# EAGLE board fingerprint (EAGLE 7.7.0)
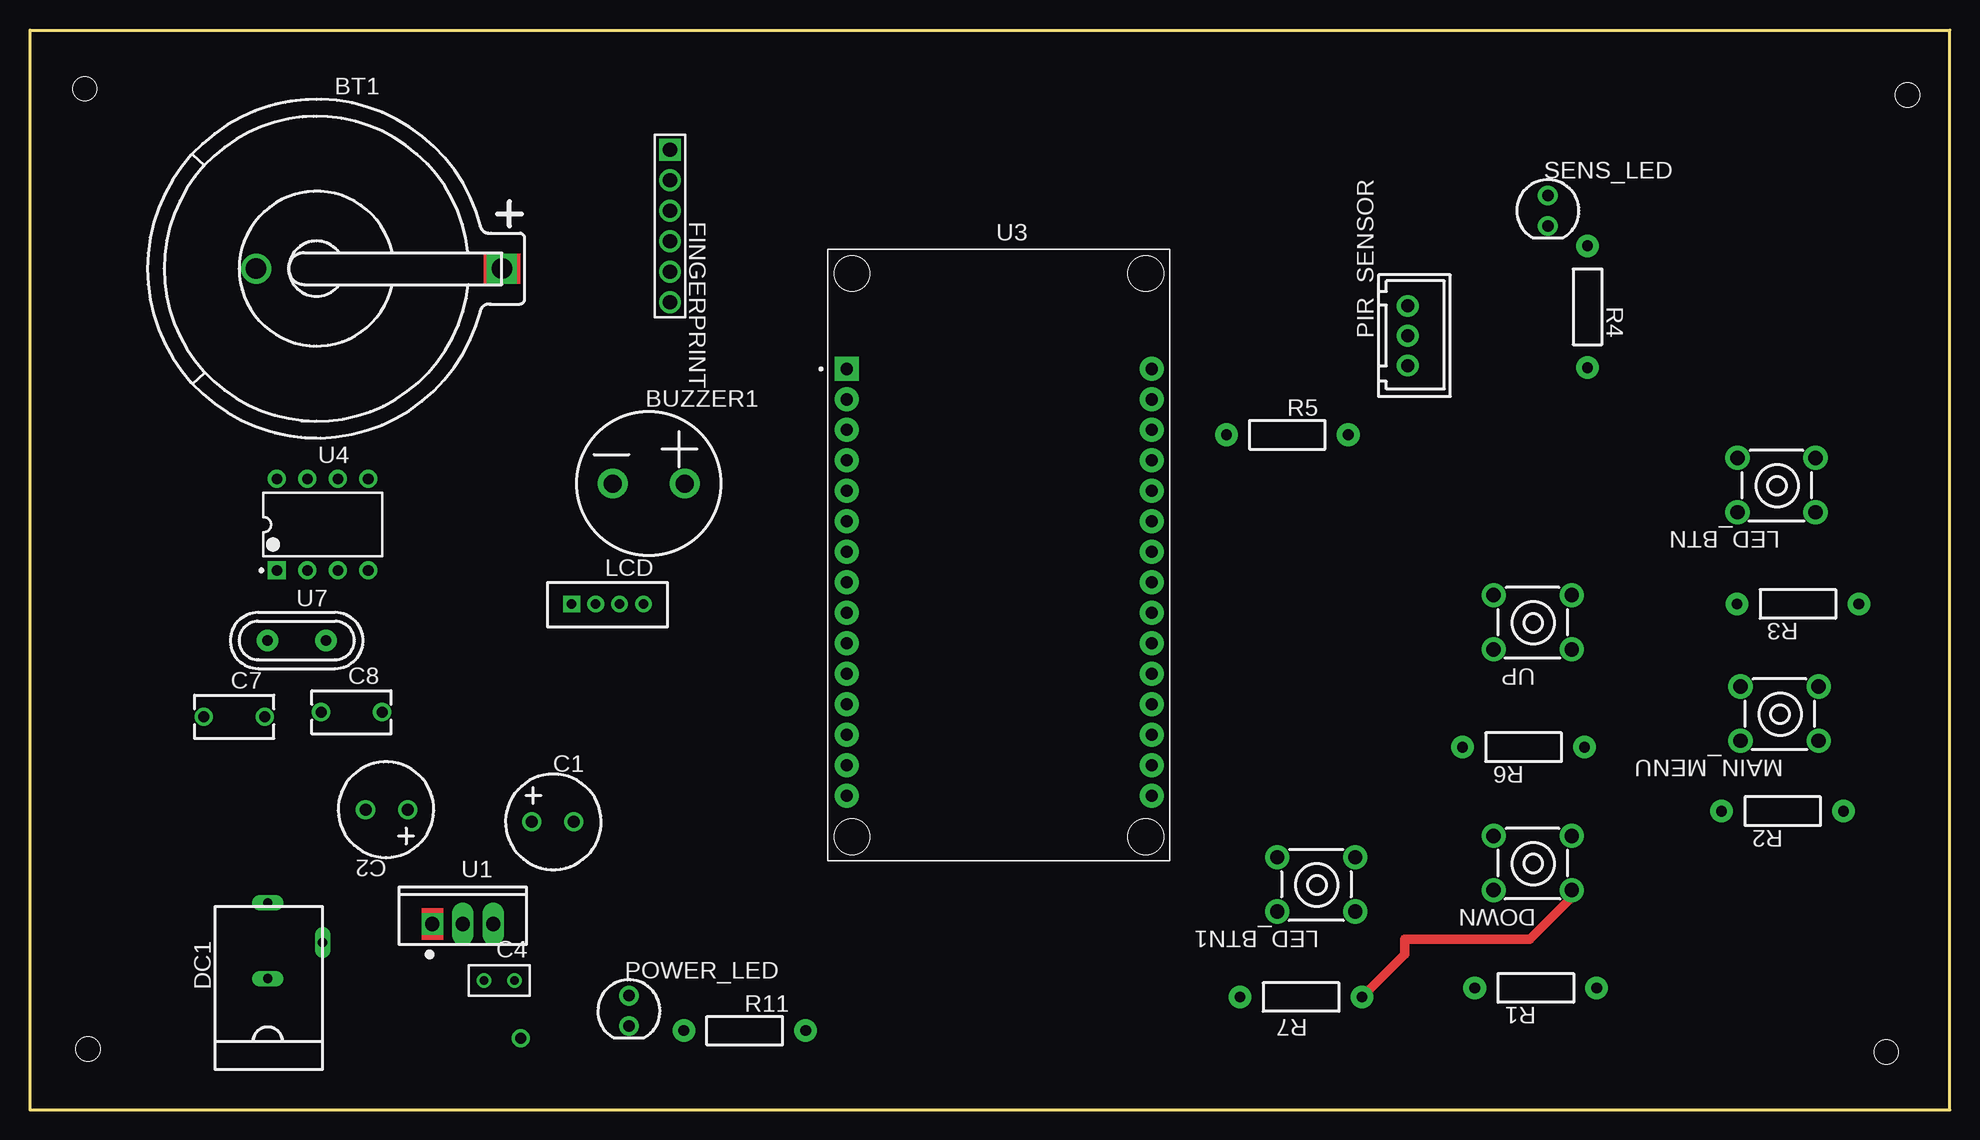
[diagram p0: board, top side]
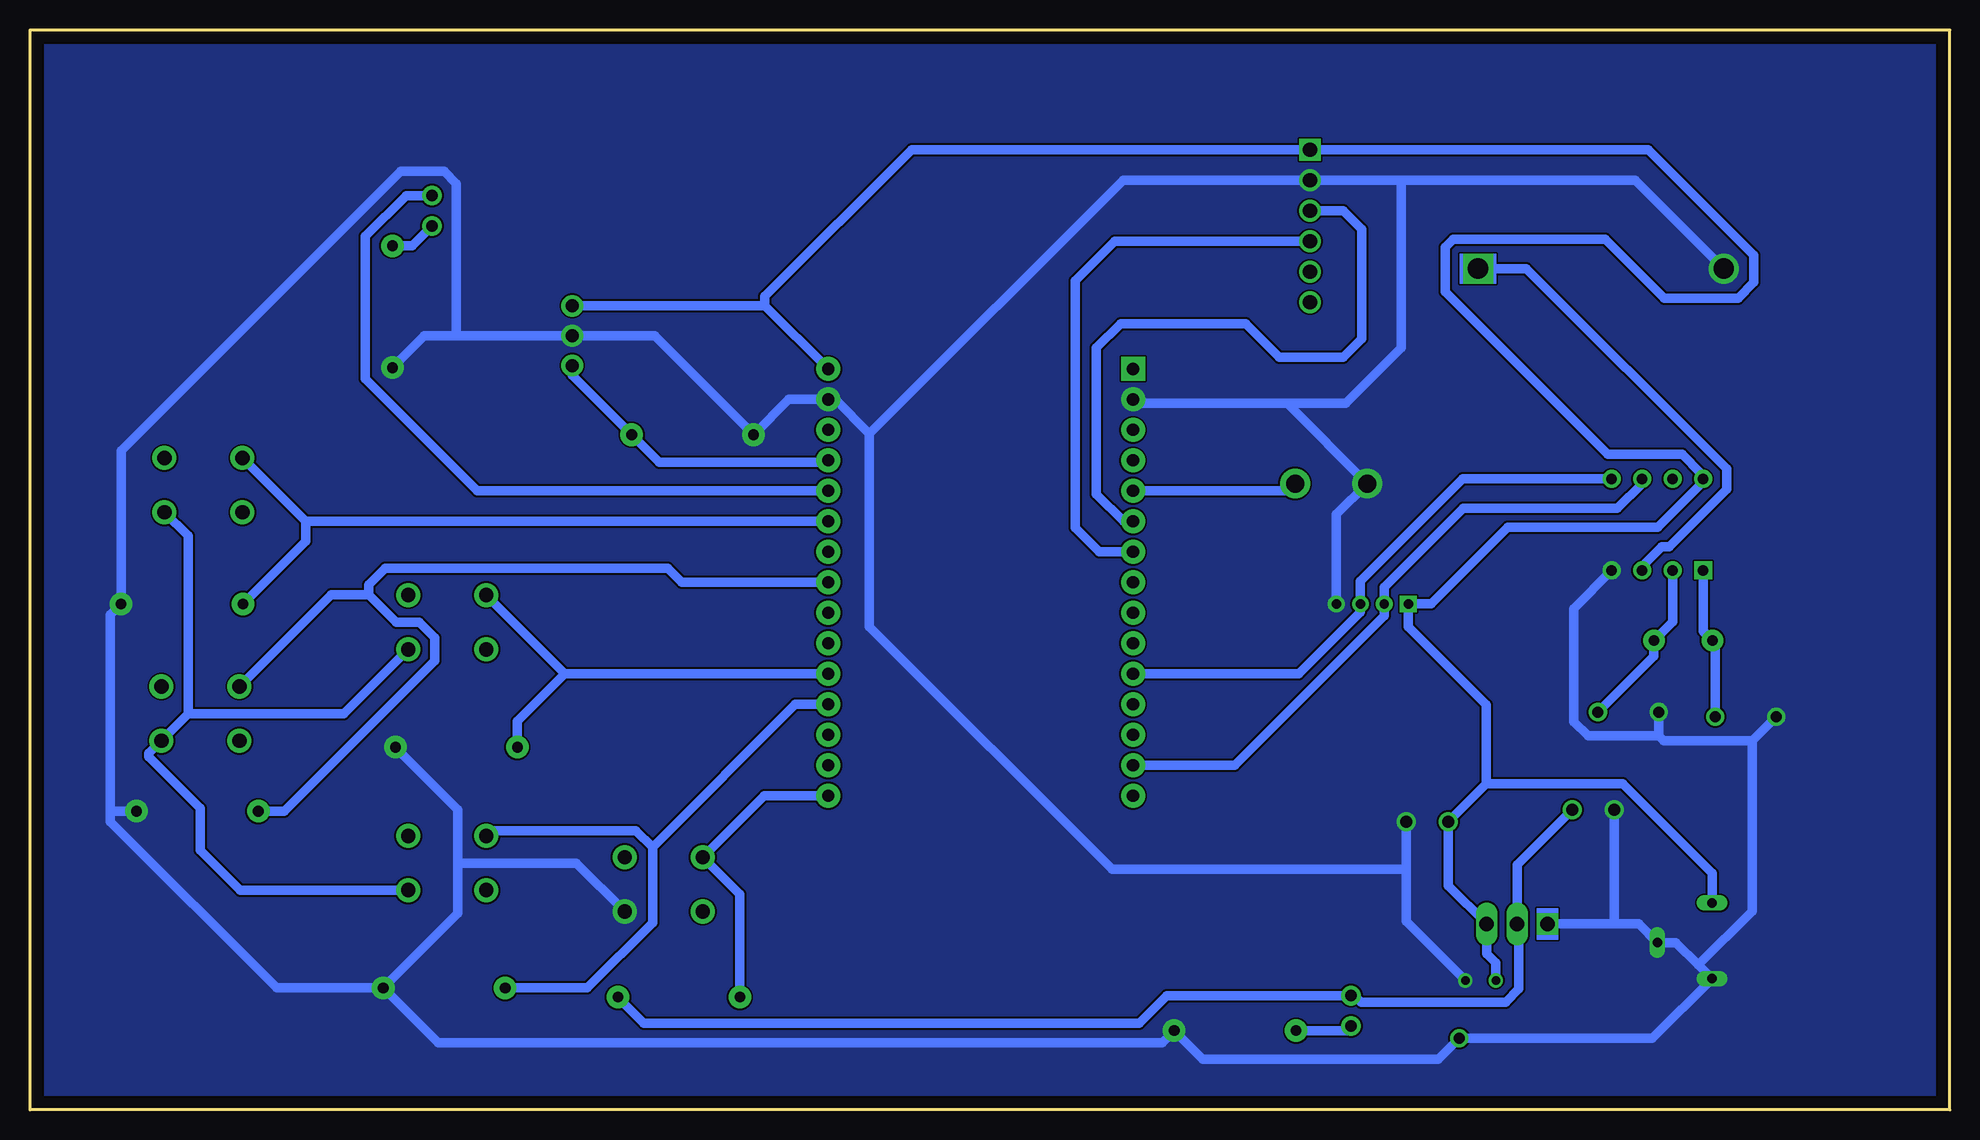
[diagram p1: board, bottom side, seen from below]

Size 159.99 x 89.99 mm. Coordinates in mm from the lower left corner, seen from the top.
Outline: 0,0 0,89.99 160,89.99 160,0 0,0
Copper layers (1*16): Top 0.035mm / dielectric 1.5mm / Bottom 0.035mm
Design rules "PCB_PCB_Fingerprint_2_2023-07-20": minimum track width 6mil, minimum drill 0.35mm, track to track 6mil, track to pad 6mil, pad to pad 6mil, via to via 6mil, smd to smd 6mil, copper to edge 40mil, drill to drill 6mil, minimum pad ring 0mil, minimum via ring 0mil, stop-mask expansion 4mil, vias tented up to drill 0mil, thermal gap 10mil

## Footprints (pad centres in the part's own frame; a part is rotated, then mirrored left to right if it is on the bottom)
BAT-TH_KEYSTONE-1025-7_1PRIMARY = drill 1.702 pad 2.489 square: 1 10.236,0 | drill 1.702 pad 2.489: 2 -10.236,0
BUZ-TH_BD12.0-P6.00-D0.9-RD_1PRIMARY = drill 1.499 pad 2.489: 1 -2.997,0; 2 2.997,0
C1_1PRIMARY = drill 0.991 pad 1.6: 1 -1.753,0; 2 1.753,0
C2_1PRIMARY = drill 0.991 pad 1.6: 1 -1.753,0; 2 1.753,0
RAD-0.1_1PRIMARY = drill 0.711 pad 1.194: 1 -1.27,0; 2 1.27,0
CAP-TH_L6.5-W3.5-P5.00-D1.0_1PRIMARY = drill 0.914 pad 1.524: 1 -2.54,0; 2 2.54,0
DC-5020_1PRIMARY = drill 0.787 pad 1.295 long: 1 3.15,2.286; 2 -3.15,2.286; 3 -0.152,-2.286
KEY-TH_4P-L6.0-W6.0-P4.50_1PRIMARY = drill 1.194 pad 2.007: 1 -3.251,-2.261; 2 3.251,-2.261; 3 3.251,2.261; 4 -3.251,2.261
P:EX60Y60D361 = drill 0.914 pad 1.524: 1 0,0
HDR-TH_6P-P2.54-V-M-1_1PRIMARY = drill 1.194 pad 1.803 square: 1 -6.35,0 | drill 1.194 pad 1.803: 2 -3.81,0; 3 -1.27,0; 4 1.27,0; 5 3.81,0; 6 6.35,0
CONN-TH_4P-P2.00_JST_04DA-8M_1PRIMARY = drill 0.787 pad 1.397 square: 1 -2.997,0 | drill 0.787 pad 1.397: 2 -0.991,0; 3 0.991,0; 4 2.997,0
CONN-TH_3P-P2.50_JST3-2.5T-1F6PRIMARY = drill 1.092 pad 1.803: 1 2.489,0; 2 0,0; 3 -2.489,0
LED-TH_BD5.0_BLUE_1PRIMARY = drill 0.965 pad 1.651: 1 0,1.27; 2 0,-1.27
R_AXIAL-0.4_1PRIMARY = drill 0.889 pad 1.88: 1 -5.08,0; 2 5.08,0
R_AXIAL-0.4_2PRIMARY = drill 0.889 pad 1.88: 1 -5.08,0; 2 5.08,0
R_AXIAL-0.4_3PRIMARY = drill 0.889 pad 1.88: 1 -5.08,0; 2 5.08,0
TO-220-3_L10.0-W4.5-P2.54-L_1PRIMARY = drill 1.194 pad 1.803 square: 1 -2.54,0 | drill 1.194 pad 1.803 long: 2 0,0; 3 2.54,0
MODULE_ESP32_DEVKIT_V1_1PRIMARY = drill 1.016 pad 2.007 square: 1 -12.7,15.519 | drill 1.016 pad 2.007: 2 -12.7,12.979; 3 -12.7,10.439; 4 -12.7,7.899; 5 -12.7,5.359; 6 -12.7,2.819; 7 -12.7,0.279; 8 -12.7,-2.261; 9 -12.7,-4.801; 10 -12.7,-7.341; 11 -12.7,-9.881; 12 -12.7,-12.421; 13 -12.7,-14.961; 14 -12.7,-17.501; 15 -12.7,-20.041; 16 12.7,-20.041; 17 12.7,-17.501; 18 12.7,-14.961; 19 12.7,-12.421; 20 12.7,-9.881; 21 12.7,-7.341; 22 12.7,-4.801; 23 12.7,-2.261; 24 12.7,0.279; 25 12.7,2.819; 26 12.7,5.359; 27 12.7,7.899; 28 12.7,10.439; 29 12.7,12.979; 30 12.7,15.519
DIP-8_L9.8-W6.6-P2.54-LS7.6-50PRIMARY = drill 0.889 pad 1.499 square: 1 -3.81,-3.81 | drill 0.889 pad 1.499: 2 -1.27,-3.81; 3 1.27,-3.81; 4 3.81,-3.81; 5 3.81,3.81; 6 1.27,3.81; 7 -1.27,3.81; 8 -3.81,3.81
HC-49S_L11.0-W4.7-P4.88_1PRIMARY = drill 0.889 pad 1.803: 1 -2.438,0; 2 2.438,0

## Placement (x,y rotation side)
BT1  1025-7  [BAT-TH_KEYSTONE-1025-7_1PRIMARY]  29.08,70.1 0 top
BUZZER1  BUZZER  [BUZ-TH_BD12.0-P6.00-D0.9-RD_1PRIMARY]  51.56,52.2 0 top
C1  10u/50v  [C1_1PRIMARY]  43.56,24 0 top
C2  22u/50v  [C2_1PRIMARY]  29.72,25.02 180 top
C4  0.1u  [RAD-0.1_1PRIMARY]  39.12,10.8 0 top
C7  6pF  [CAP-TH_L6.5-W3.5-P5.00-D1.0_1PRIMARY]  17.02,32.77 0 top
C8  6pF  [CAP-TH_L6.5-W3.5-P5.00-D1.0_1PRIMARY]  26.8,33.15 0 top
DC1  DC005-2.0MM  [DC-5020_1PRIMARY]  22.1,14.1 90 top
DOWN  button6*6*8.5  [KEY-TH_4P-L6.0-W6.0-P4.50_1PRIMARY]  125.22,20.57 180 top
DUMMY1  [P:EX60Y60D361]  40.89,5.97 0 top
FINGERPRINT  Header-Male-2.54_1x6  [HDR-TH_6P-P2.54-V-M-1_1PRIMARY]  53.34,73.66 270 top
LCD  04DA-8M_LF__SN_  [CONN-TH_4P-P2.00_JST_04DA-8M_1PRIMARY]  48.13,42.16 0 top
LED_BTN  button6*6*8.5  [KEY-TH_4P-L6.0-W6.0-P4.50_1PRIMARY]  145.54,52.07 180 top
LED_BTN1  button6*6*8.5  [KEY-TH_4P-L6.0-W6.0-P4.50_1PRIMARY]  107.19,18.8 180 top
MAIN_MENU  button6*6*8.5  [KEY-TH_4P-L6.0-W6.0-P4.50_1PRIMARY]  145.8,33.02 180 top
PIR_SENSOR  JST3-2.5T-1-3A  [CONN-TH_3P-P2.50_JST3-2.5T-1F6PRIMARY]  114.81,64.52 90 top
POWER_LED  LED-TH-5mm_B  [LED-TH_BD5.0_BLUE_1PRIMARY]  49.91,8.26 0 top
R1  10k  [R_AXIAL-0.4_1PRIMARY]  125.48,10.16 180 top
R2  10k  [R_AXIAL-0.4_1PRIMARY]  146.05,24.89 180 top
R3  10k  [R_AXIAL-0.4_1PRIMARY]  147.32,42.16 180 top
R4  220  [R_AXIAL-0.4_2PRIMARY]  129.79,66.93 270 top
R5  10k  [R_AXIAL-0.4_3PRIMARY]  104.78,56.26 0 top
R6  10k  [R_AXIAL-0.4_1PRIMARY]  124.46,30.23 180 top
R7  10k  [R_AXIAL-0.4_1PRIMARY]  105.92,9.4 180 top
R11  220  [R_AXIAL-0.4_3PRIMARY]  59.56,6.6 0 top
SENS_LED  LED-TH-5mm_B  [LED-TH_BD5.0_BLUE_1PRIMARY]  126.49,74.93 0 top
U1  LM1117T-3.3  [TO-220-3_L10.0-W4.5-P2.54-L_1PRIMARY]  36.07,15.49 0 top
U3  ESP32-DEVKIT-V1  [MODULE_ESP32_DEVKIT_V1_1PRIMARY]  80.77,46.23 0 top
U4  DS1307+  [DIP-8_L9.8-W6.6-P2.54-LS7.6-50PRIMARY]  24.38,48.77 0 top
U7  XTAL-10D8X4D5-P5D08  [HC-49S_L11.0-W4.7-P4.88_1PRIMARY]  22.22,39.12 0 top
UP  button6*6*8.5  [KEY-TH_4P-L6.0-W6.0-P4.50_1PRIMARY]  125.22,40.64 180 top

## Library data of the parts
BT1 BUZZER1 C1 C2 C4 C7 C8 DC1 DOWN DUMMY1 FINGERPRINT LCD LED_BTN LED_BTN1 MAIN_MENU PIR_SENSOR POWER_LED R1-R7 R11 SENS_LED U1 U3 U4 U7 UP = PCB_PCB_Fingerprint_2_2023-07-20

## Nets
3.3V: C2.1 DOWN.4 LED_BTN.4 MAIN_MENU.4 POWER_LED.1 R7.1 U1.2 UP.4
5V: C1.1 C4.1 DC1.1 FINGERPRINT.1 LCD.1 PIR_SENSOR.1 U1.3 U3.30 U4.8
D4: BUZZER1.2 U3.5
DOWN_1: DOWN.1
DOWN_3: DOWN.3
DWN_BTN: DOWN.2 R1.2 U3.19
DX1: C7.2 U4.1 U7.1
DX2: C8.2 U4.2 U7.2
FINGERPRINT_5: FINGERPRINT.5
FINGERPRINT_6: FINGERPRINT.6
GND: BT1.2 BUZZER1.1 C1.2 C2.2 C4.2 C7.1 C8.1 DC1.2 DC1.3 FINGERPRINT.2 LCD.4 LED_BTN1.4 PIR_SENSOR.2 R1.1 R2.1 R3.1 R4.2 R5.1 R6.1 R11.2 U1.1 U3.2 U3.29 U4.4
LED_BTN: LED_BTN.2 R3.2 U3.25
LED_BTN1_1: LED_BTN1.1
LED_BTN1_3: LED_BTN1.3
LED_BTN_1: LED_BTN.1
LED_BTN_3: LED_BTN.3
MAIN_BTN: MAIN_MENU.2 R2.2 U3.23
MAIN_MENU_1: MAIN_MENU.1
MAIN_MENU_3: MAIN_MENU.3
MOTION: PIR_SENSOR.3 R5.2 U3.27
PIR_LED: SENS_LED.1 U3.26
R11_1: POWER_LED.2 R11.1
RESET: LED_BTN1.2 R7.2 U3.16
RX: FINGERPRINT.4 U3.7
SCL: LCD.2 U3.14 U4.6
SDA: LCD.3 U3.11 U4.5
SENS_LED_2: R4.1 SENS_LED.2
TX: FINGERPRINT.3 U3.6
U3_1: U3.1
U3_3: U3.3
U3_4: U3.4
U3_8: U3.8
U3_9: U3.9
U3_10: U3.10
U3_12: U3.12
U3_13: U3.13
U3_15: U3.15
U3_17: U3.17
U3_18: U3.18
U3_21: U3.21
U3_22: U3.22
U3_24: U3.24
U3_28: U3.28
U4_3: BT1.1 U4.3
UP_1: UP.1
UP_3: UP.3
UP_BTN: R6.2 U3.20 UP.2

## Tracks (layer width: path | path; a pad name or v marks a point on that pad's centre or on a via)
3.3V
  Top 0.8: DOWN.4 128.47,17.73 124.97,14.22 114.55,14.22 114.55,12.95 R7.1
  Bottom 0.8: R7.1 108.84,7.24 67.56,7.24 65.28,9.53 POWER_LED.1 49.58,9.53 49.05,8.99 37.01,8.99 35.92,10.11 35.92,15.34 U1.2 36.07,20.42 C2.1 | 146.79,33.02 MAIN_MENU.4 150.09,29.72 150.09,29.44 145.8,25.15 145.8,21.64 142.47,18.31 DOWN.4 | UP.4 133.83,33.02 146.79,33.02 | 146.79,33.02 146.79,47.83 LED_BTN.4
5V
  Bottom 0.8: 20.75,52.58 20.75,52.15 24.36,48.54 36.86,48.54 43.23,42.16 LCD.1 45.14,40.26 38.63,33.78 38.63,27.18 | U4.8 20.75,52.58 | 20.75,52.58 20.75,53.06 22.33,54.64 28.5,54.64 42.06,68.17 42.06,71.88 41.38,72.57 28.73,72.57 23.83,67.64 17.65,67.64 16.33,68.96 16.33,71.22 25.12,80.01 FINGERPRINT.1 86.51,80.01 98.75,67.79 98.75,67.01 | 38.63,27.18 C1.1 41.81,18.69 U1.3 38.61,13.03 37.85,12.27 C4.1 | DC1.1 19.81,19.74 27.25,27.18 38.63,27.18 | 98.75,67.01 PIR_SENSOR.1 | U3.30 98.75,67.01
D4
  Bottom 0.8: U3.5 55.17,51.59 BUZZER1.2
DWN_BTN
  Bottom 0.8: DOWN.2 121.51,23.27 109.5,23.27 108.1,21.9 | U3.19 96.22,33.81 108.1,21.9 | 108.1,21.9 108.1,15.6 113.54,10.16 R1.2
DX1
  Bottom 0.8: C7.2 19.56,38.89 U7.1 20.57,39.9 U4.1
DX2
  Bottom 0.8: C8.2 24.66,37.82 U7.2 23.11,40.67 U4.2
GND
  Bottom 0.8: R1.1 125.98,5.59 65.66,5.59 R11.2 62.28,4.24 42.62,4.24 40.89,5.97 24.79,5.97 DC1.2 20.95,12.09 | 153.31,24.89 153.31,24.03 139.45,10.16 R1.1 | 153.31,24.89 153.31,41.25 R3.1 152.4,54.92 129.08,78.23 125.48,78.23 124.46,77.19 124.46,64.52 | 90.04,56.34 92.89,59.21 U3.29 96.75,59.21 R5.1 107.95,64.52 PIR_SENSOR.2 124.46,64.52 | 45.31,20.04 69.8,20.04 90.04,40.26 90.04,56.34 | 90.04,56.34 68.91,77.47 FINGERPRINT.2 45.72,77.47 | 45.31,20.04 45.31,15.72 C4.2 | 45.31,20.04 C1.2 | 55.22,58.88 BUZZER1.1 51.13,49.63 LCD.4 | 45.72,77.47 26.21,77.47 BT1.2 | C7.1 16.48,30.76 | 24.26,31.17 23.85,30.76 16.48,30.76 | 20.95,12.09 16.48,16.56 16.48,30.76 | 20.95,12.09 22.83,13.95 DC1.3 25.93,15.49 27.97,15.49 | 24.26,31.17 C8.1 | U4.4 31.37,41.78 31.37,32.36 30.15,31.17 24.26,31.17 | 124.46,64.52 127.13,64.52 R4.2 | 27.97,15.49 C2.2 | 27.97,15.49 U1.1 | 45.72,77.47 45.72,63.5 50.37,58.88 55.22,58.88 | R2.1 153.31,24.89 | R1.1 124.33,16.38 124.33,20.57 | 124.33,20.57 124.33,25.02 R6.1 | LED_BTN1.4 114.48,20.57 124.33,20.57 | 55.22,58.88 67.74,58.88 U3.2
  pour Bottom (no thermals): -3.05,93.73 -3.05,-2.29 -3.56,-2.79 162.56,-2.79 163.07,-3.3 163.07,91.69 164.59,93.22 162.05,93.22 159,96.27
LED_BTN
  Bottom 0.8: 137.01,49.05 LED_BTN.2 | U3.25 137.01,49.05 | R3.2 137.01,47.4 137.01,49.05
MAIN_BTN
  Bottom 0.8: 131.75,42.93 129.46,40.64 127.56,40.64 126.26,39.34 126.26,37.44 138.81,24.89 R2.2 | MAIN_MENU.2 134.9,42.93 131.75,42.93 | 131.75,42.93 131.75,43.76 130.4,45.14 106.86,45.14 105.69,43.97 U3.23
MOTION
  Bottom 0.8: PIR_SENSOR.3 114.81,61.21 R5.2 107.57,53.98 93.62,53.98 U3.27
PIR_LED
  Bottom 0.8: SENS_LED.1 128.65,76.2 132.06,72.8 132.06,60.91 122.73,51.59 U3.26
R11_1
  Bottom 0.8: R11.1 50.29,6.6 POWER_LED.2
RESET
  Bottom 0.8: R7.2 100.84,17.96 LED_BTN1.2 98.81,26.19 U3.16
RX
  Bottom 0.8: U3.7 70.89,46.51 72.9,48.51 72.9,69.09 69.6,72.39 FINGERPRINT.4
SCL
  Bottom 0.8: U4.6 25.65,52.2 27.71,50.14 40.56,50.14 47.14,43.56 LCD.2 47.14,41.2 59.61,28.73 U3.14
SDA
  Bottom 0.8: U4.5 40.61,52.58 49.12,44.07 LCD.3 49.12,41.48 54.25,36.35 U3.11
SENS_LED_2
  Bottom 0.8: R4.1 128.14,72.01 SENS_LED.2
TX
  Bottom 0.8: U3.6 68.86,49.05 71.12,51.31 71.12,63.5 69.09,65.53 58.67,65.53 55.88,62.74 50.55,62.74 49.02,64.26 49.02,73.41 50.55,74.93 FINGERPRINT.3
U4_3
  Bottom 0.8: BT1.1 35.31,70.1 18.62,53.42 18.62,51.71 23.39,46.94 24.03,46.94 25.65,45.31 U4.3
UP_BTN
  Bottom 0.8: 115.42,36.35 UP.2 | U3.20 115.42,36.35 | R6.2 119.38,32.39 115.42,36.35